# Altium PCB PCB1.PcbDoc
Units mil, origin at the board's own origin, x right, y up, seen from the top; angles counter-clockwise.
Board outline 6000 x 4000 mil, 2 copper layers (Top Layer, Bottom Layer); 89 components, 74 nets, 404 pads, 0 vias.
Unrouted connection lines stored in the file: 225.
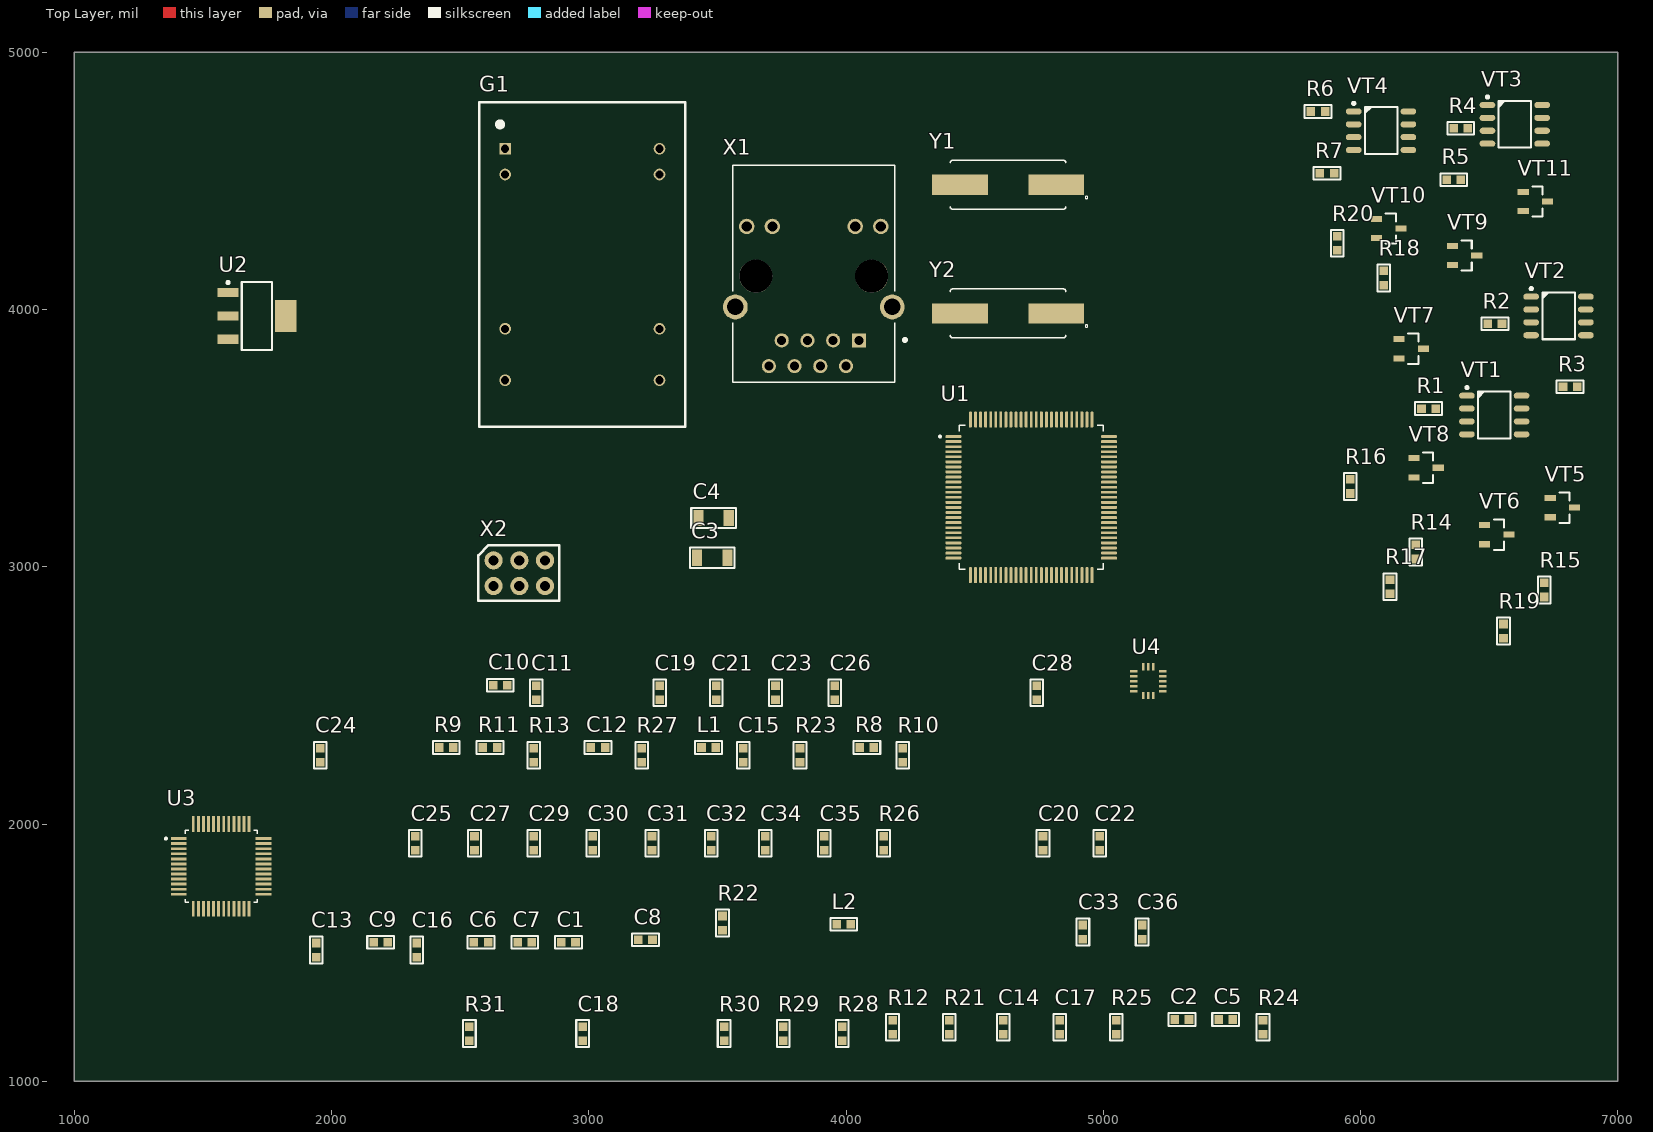
[diagram p0: Top Layer view]
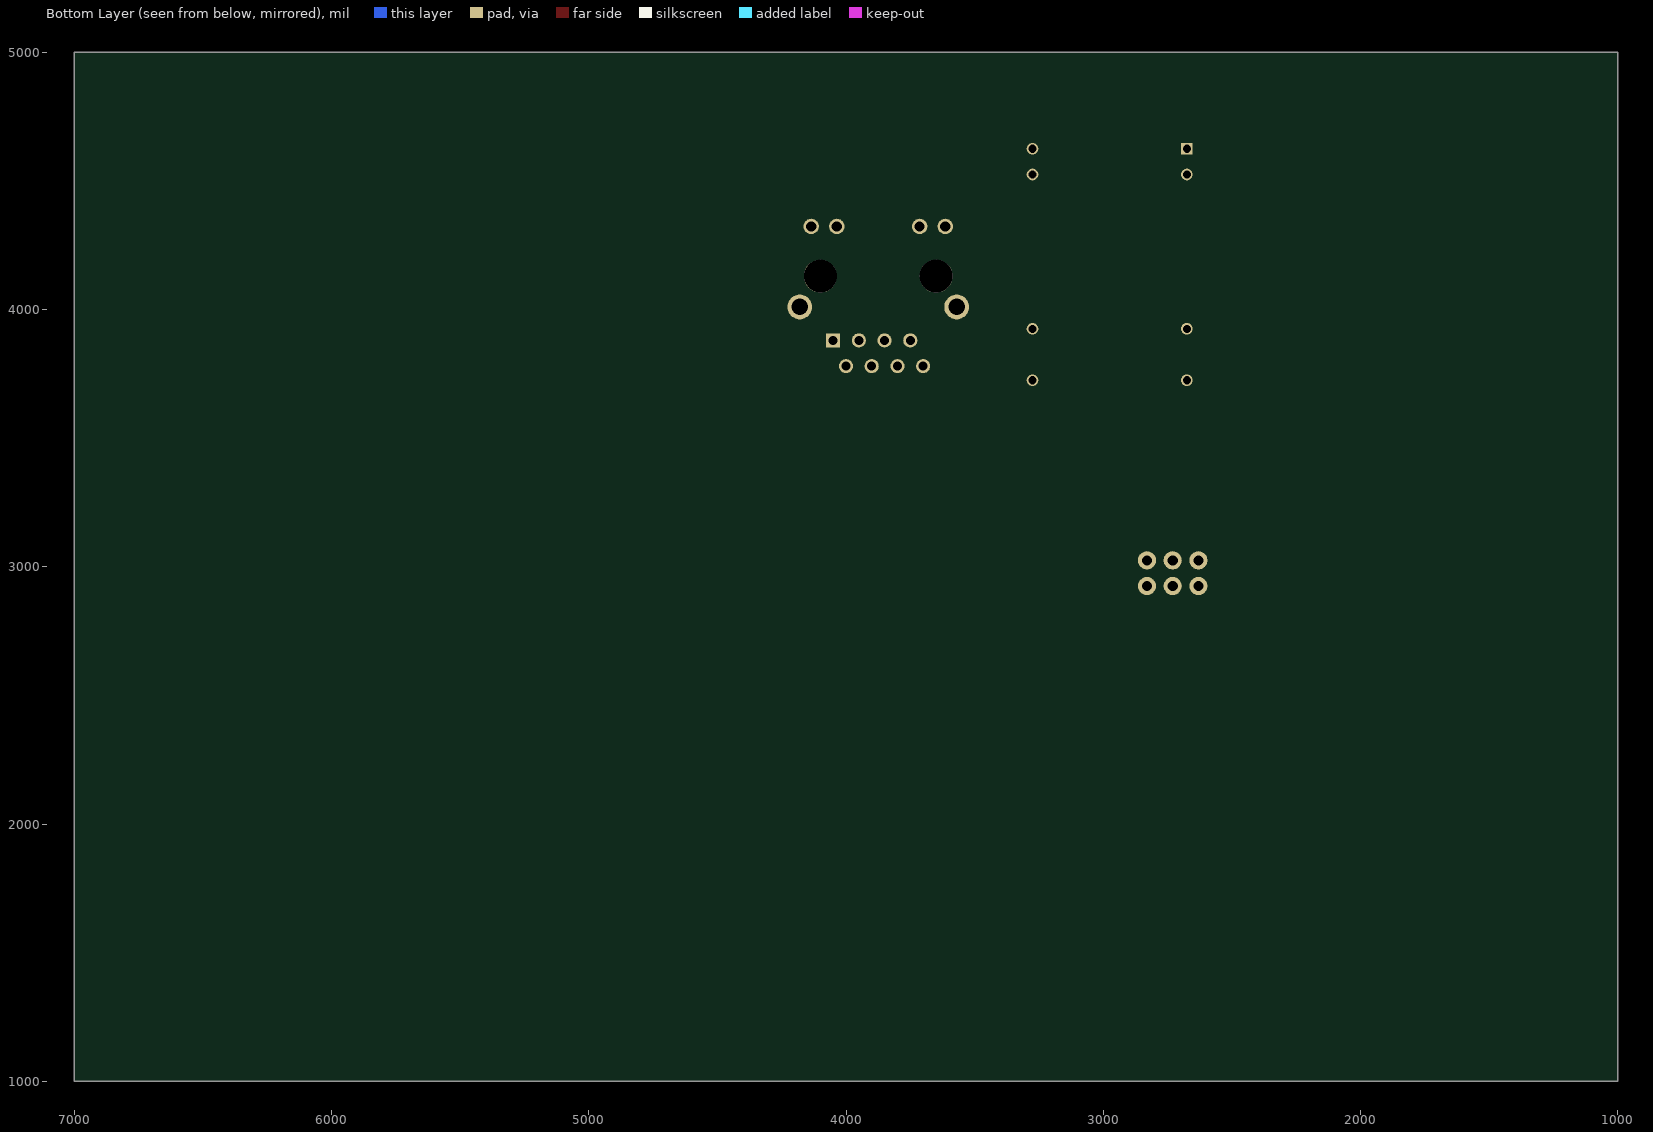
[diagram p1: Bottom Layer view, seen from below]

## Layer stack, top to bottom
Top Solder: solder mask 0.4, Solder Resist, Dk 3.5
Top Layer: signal copper 1.4
Dielectric 1: dielectric 12.6, FR-4, Dk 4.8
Bottom Layer: signal copper 1.4
Bottom Solder: solder mask 0.4, Solder Resist, Dk 3.5

## Board outline
1000,1000 7000,1000 7000,5000 1000,5000

## Design rules (kind name [scope] priority, off if disabled: settings)
Clearance [All] p1: gap=10 ignorepadtopadclearanceinfootprint=FALSE except(0: Arc-Hole Track-Hole SMDPad-Hole THPad-Hole Via-Hole Fill-Hole Poly-Hole Region-Hole Text-Hole)
PolygonConnect [All] p1: connectstyle=Relief reliefconductorwidth=10 reliefentries=4 polygonreliefangle="90 Angle" airgapwidth=10
RoomDefinition JAM [InComponentClass('JAM')] p1: confinementstyle=ConfineIn formatcopy=TRUE lockcomponents=FALSE outline 986,985 1285,985 1285,1375 986,1375
RoutingVias [All] p1: holewidth=28 width=50 viastyle="Through Hole" minholewidth=28 minwidth=50 maxholewidth=28 maxwidth=50
SolderMaskExpansion [All] p1: expansion=4 istentingtop=FALSE
Width [All] p1: maxlimit=10 minlimit=10 preferedwidth=10
30 further rules are at their usual default settings.

## Classes and differential pairs
net class Digtal: ACT CSC INT INT1 LINK MISO MOSI NRST RST SCK SCL SDA SWCLK SWDIO SWO
net class Power: +3,3V +5V +18V AGND AVDD GND GNDX
component class JAM: C1 C2 C3 C6 C8 C10 C12 C14 C16 C18 C20 C22 C24 C26 C28 C30 C32 C34 C36 G1 L1 L2 R1 R2 R3 R4 R5 R6 R7 R8 R9 R10 R11 R12 R13 R14 R15 R16 R17 R18 R19 R20 R21 R22 R23 R24 R25 R26 R27 R28 R29 R30 R31 U1 U2 U3 U4 VT1 VT2 VT3 VT4 VT5 VT6 VT7 VT8 VT9 VT10 VT11 X1 X2 Y1 Y2

## Components (designator, comment, footprint, x,y, rotation, side; value= is the part's Value field where it differs from the comment)
C1 "47uF" 0603 2921,1540 r0 top
C2 "0,1uF" 0603 5306,1240 r0 top
C3 "Ceramic capacitor, 1nF, X7R, ±10%, 2kV, 1206, -55...+125°C" "CAP: 1206" 3480,3035 r0 top value=1nF
C4 "Ceramic capacitor, 1nF, X7R, ±10%, 2kV, 1206, -55...+125°C" "CAP: 1206" 3485,3190 r0 top value=1nF
C5 "10uF" 0603 5476,1240 r0 top
C6 "47uF" 0603 2581,1540 r0 top
C7 "0,1uF" 0603 2751,1540 r0 top
C8 "18pF" 0603 3220,1550 r0 top
C9 "18pF" 0603 2191,1540 r0 top
C10 "20pF" 0603 2656,2540 r0 top
C11 "20pF" 0603 2796,2510 r90 top
C12 "10nF" 0603 3036,2297.44 r0 top
C13 "6,8nF" 0603 1941,1510 r90 top
C14 "6,8nF" 0603 4611,1210 r90 top
C15 "4,7uF" 0603 3601,2267.44 r90 top
C16 "0,1uF" 0603 2331,1510 r90 top
C17 "10nF" 0603 4831,1210 r90 top
C18 "0,1uF" 0603 2976,1185 r90 top
C19 "1uF" 0603 3276,2510 r90 top
C20 "1uF" 0603 4766,1925 r90 top
C21 "0,1uF" 0603 3496,2510 r90 top
C22 "0,1uF" 0603 4986,1925 r90 top
C23 "2,2uF" 0603 3726,2510 r90 top
C24 "0,1uF" 0603 1956,2267.44 r90 top
C25 "0,1uF" 0603 2326,1925 r90 top
C26 "2,2uF" 0603 3956,2510 r90 top
C27 "0,1uF" 0603 2556,1925 r90 top
C28 "0,1uF" 0603 4741,2510 r90 top
C29 "0,1uF" 0603 2786,1925 r90 top
C30 "0,1uF" 0603 3016,1925 r90 top
C31 "0,1uF" 0603 3246,1925 r90 top
C32 "0,1uF" 0603 3476,1925 r90 top
C33 "10uF" 0603 4921,1580 r90 top
C34 "0,1uF" 0603 3686,1925 r90 top
C35 "4,7uF" 0603 3916,1925 r90 top
C36 "0,1uF" 0603 5151,1580 r90 top
G1 "SCWN03B-05" DIP 2975,4175 r0 top
L1 "120uHz" 0603 3466,2297.44 r0 top
L2 "120uHz" 0603 3991,1610 r0 top
R1 "3k" 0603 6265,3615 r0 top
R2 "3k" 0603 6522.56,3945 r0 top
R3 "3k" 0603 6815,3700 r0 top
R4 "3k" 0603 6390,4705 r0 top
R5 "3k" 0603 6362.44,4505 r0 top
R6 "3k" 0603 5835,4770 r0 top
R7 "3k" 0603 5870,4530 r0 top
R8 "10k" 0603 4081,2297.44 r0 top
R9 "10k" 0603 2446,2297.44 r0 top
R10 "10k" 0603 4221,2267.44 r90 top
R11 "10k" 0603 2616,2297.44 r0 top
R12 "10k" 0603 4181,1210 r90 top
R13 "10k" 0603 2786,2267.44 r90 top
R14 "10k" 0603 6215,3057.56 r90 top
R15 "10k" 0603 6715,2910 r90 top
R16 "10k" 0603 5960,3312.44 r90 top
R17 "10k" 0603 6115,2922.44 r90 top
R18 "10k" 0603 6090,4122.56 r90 top
R19 "10k" 0603 6556,2750 r90 top
R20 "10k" 0603 5910,4257.56 r90 top
R21 "12,4k" 0603 4401,1210 r90 top
R22 "1M" 0603 3520,1615 r90 top
R23 "10k" 0603 3821,2267.44 r90 top
R24 "82" 0603 5621,1210 r90 top
R25 "82" 0603 5051,1210 r90 top
R26 "10k" 0603 4146,1925 r90 top
R27 "51" 0603 3206,2267.44 r90 top
R28 "?" 0603 3986,1185 r90 top
R29 "51" 0603 3756,1185 r90 top
R30 "1k" 0603 3526,1185 r90 top
R31 "1k" 0603 2536,1185 r90 top
U1 "STM32F407VGT6" QFP50P1600X1600X160-100N 4720,3270 r0 top
U2 "LD1117S33" SOT-223L 1710,3975 r0 top
U3 "W5500" QFP50P900X900X160-48N 1571,1835 r0 top
U4 "LIS331DL" LGA16R50P3X5_300X300X100 5175,2555 r0 top
VT1 "MOCD217R2M" SO-8 6520,3590 r0 top
VT2 "MOCD217R2M" SO-8 6770,3975 r0 top
VT3 "MOCD217R2M" SO-8 6600,4720 r0 top
VT4 "MOCD217R2M" SO-8 6080,4695 r0 top
VT5 "AOD407" SOT23 6785,3230 r0 top
VT6 "AOD407" SOT23 6530,3125 r0 top
VT7 "AOD407" SOT23 6197.24,3847.4 r0 top
VT8 "AOD407" SOT23 6255,3385 r0 top
VT9 "AOD407" SOT23 6405,4210 r0 top
VT10 "AOD407" SOT23 6110,4315 r0 top
VT11 "AOD407" SOT23 6680,4420 r0 top
X1 "HR911105A" HANRUN_HR911105A 3874.8,4130 r0 top
X2 "PROG" 3x2x2,54 2726.46,2971.85 r0 top
Y1 "25MHz" XTAL1170X500X450 4630,4485 r180 top
Y2 "8MHz" XTAL1170X500X450 4630,3985 r180 top

## Footprints (in the part's own frame and the unit in brackets; to place one, negate y for a bottom-side part, rotate by r counter-clockwise, add the part's x,y. Pads: shape width x height; smd on the part's side, far side on the other; paste and mask are expansions set on the pad)
3x2x2,54 [mm]
  round 1.8 hole 1: 1(-2.45,1.35) 2(0.09,1.35) 3(2.63,1.35) 4(-2.45,-1.19) 5(0.09,-1.19) 6(2.63,-1.19)
  silkscreen extent -3.95,-2.65 4.05,2.85
0603 [mm]
  rect 0.85x0.85 smd: 1(-0.7,0) 2(0.7,0)
  silkscreen extent -1.33,-0.63 1.33,0.63, body extent -0.8,-0.4 0.8,0.4, height 0.3
"CAP: 1206" [mm]
  rect 1x1.6 smd: 1(-1.5,0) 2(1.5,0)
  silkscreen extent -2.2,-1 2.2,1, body extent -1.6,-0.8 1.6,0.8, height 1
DIP [mm]
  rect 1.15x1.15 hole 0.8: 2(-7.62,11.43)
  round 1.15 hole 0.8: 3(-7.62,8.89) 9(-7.62,-6.35) 11(-7.62,-11.43) 14(7.62,-11.43) 16(7.62,-6.35) 22(7.62,8.89) 23(7.62,11.43)
  silkscreen extent -10.16,-16 10.16,16
HANRUN_HR911105A [mm]
  rect 1.398x1.398 hole 0.89: 1(4.45,-6.35)
  round 1.398 hole 0.89: 2(3.18,-8.89) 3(1.91,-6.35) 4(0.64,-8.89) 5(-0.63,-6.35) 6(-1.9,-8.89) 7(-3.17,-6.35) 8(-4.44,-8.89)
  round 1.53 hole 1.02: 9(6.625,4.9) 10(4.085,4.9) 11(-4.085,4.9) 12(-6.625,4.9)
  round 2.445 hole 1.63: 15(7.745,-3.05) 16(-7.745,-3.05)
  round 3.25 hole 3.25 unplated: ""(-5.715,0) ""(5.715,0)
  silkscreen extent -8,-10.48 9.15,10.92
LGA16R50P3X5_300X300X100 [mil]
  rect 28x10 smd: 1(-56,39) 2(-56,20) 3(-56,0) 4(-56,-20) 5(-56,-39) 9(56,-39) 10(56,-20) 11(56,0) 12(56,20) 13(56,39)
  rect 10x28 smd: 6(-20,-56) 7(0,-56) 8(20,-56) 14(20,56) 15(0,56) 16(-20,56)
QFP50P900X900X160-48N [mm]
  rect 1.56x0.28 smd: 1(-4.18,2.75) 2(-4.18,2.25) 3(-4.18,1.75) 4(-4.18,1.25) 5(-4.18,0.75) 6(-4.18,0.25) 7(-4.18,-0.25) 8(-4.18,-0.75) 9(-4.18,-1.25) 10(-4.18,-1.75) 11(-4.18,-2.25) 12(-4.18,-2.75) 25(4.18,-2.75) 26(4.18,-2.25) 27(4.18,-1.75) 28(4.18,-1.25) 29(4.18,-0.75) 30(4.18,-0.25) 31(4.18,0.25) 32(4.18,0.75) 33(4.18,1.25) 34(4.18,1.75) 35(4.18,2.25) 36(4.18,2.75)
  rect 0.28x1.56 smd: 13(-2.75,-4.18) 14(-2.25,-4.18) 15(-1.75,-4.18) 16(-1.25,-4.18) 17(-0.75,-4.18) 18(-0.25,-4.18) 19(0.25,-4.18) 20(0.75,-4.18) 21(1.25,-4.18) 22(1.75,-4.18) 23(2.25,-4.18) 24(2.75,-4.18) 37(2.75,4.18) 38(2.25,4.18) 39(1.75,4.18) 40(1.25,4.18) 41(0.75,4.18) 42(0.25,4.18) 43(-0.25,4.18) 44(-0.75,4.18) 45(-1.25,4.18) 46(-1.75,4.18) 47(-2.25,4.18) 48(-2.75,4.18)
  silkscreen extent -5.55,-3.55 3.55,3.55
QFP50P1600X1600X160-100N [mm]
  rrect50% 1.56x0.28 smd: 1(-7.68,6) 2(-7.68,5.5) 3(-7.68,5) 4(-7.68,4.5) 5(-7.68,4) 6(-7.68,3.5) 7(-7.68,3) 8(-7.68,2.5) 9(-7.68,2) 10(-7.68,1.5) 11(-7.68,1) 12(-7.68,0.5) 13(-7.68,0) 14(-7.68,-0.5) 15(-7.68,-1) 16(-7.68,-1.5) 17(-7.68,-2) 18(-7.68,-2.5) 19(-7.68,-3) 20(-7.68,-3.5) 21(-7.68,-4) 22(-7.68,-4.5) 23(-7.68,-5) 24(-7.68,-5.5) 25(-7.68,-6) 51(7.68,-6) 52(7.68,-5.5) 53(7.68,-5) 54(7.68,-4.5) 55(7.68,-4) 56(7.68,-3.5) 57(7.68,-3) 58(7.68,-2.5) 59(7.68,-2) 60(7.68,-1.5) 61(7.68,-1) 62(7.68,-0.5) 63(7.68,0) 64(7.68,0.5) 65(7.68,1) 66(7.68,1.5) 67(7.68,2) 68(7.68,2.5) 69(7.68,3) 70(7.68,3.5) 71(7.68,4) 72(7.68,4.5) 73(7.68,5) 74(7.68,5.5) 75(7.68,6)
  rrect50% 0.28x1.56 smd: 26(-6,-7.68) 27(-5.5,-7.68) 28(-5,-7.68) 29(-4.5,-7.68) 30(-4,-7.68) 31(-3.5,-7.68) 32(-3,-7.68) 33(-2.5,-7.68) 34(-2,-7.68) 35(-1.5,-7.68) 36(-1,-7.68) 37(-0.5,-7.68) 38(0,-7.68) 39(0.5,-7.68) 40(1,-7.68) 41(1.5,-7.68) 42(2,-7.68) 43(2.5,-7.68) 44(3,-7.68) 45(3.5,-7.68) 46(4,-7.68) 47(4.5,-7.68) 48(5,-7.68) 49(5.5,-7.68) 50(6,-7.68) 76(6,7.68) 77(5.5,7.68) 78(5,7.68) 79(4.5,7.68) 80(4,7.68) 81(3.5,7.68) 82(3,7.68) 83(2.5,7.68) 84(2,7.68) 85(1.5,7.68) 86(1,7.68) 87(0.5,7.68) 88(0,7.68) 89(-0.5,7.68) 90(-1,7.68) 91(-1.5,7.68) 92(-2,7.68) 93(-2.5,7.68) 94(-3,7.68) 95(-3.5,7.68) 96(-4,7.68) 97(-4.5,7.68) 98(-5,7.68) 99(-5.5,7.68) 100(-6,7.68)
  silkscreen extent -9.1,-7.1 7.1,7.1
SO-8 [mm]
  rrect100% 1.55x0.6 smd: 1(-2.7,1.905) 2(-2.7,0.635) 3(-2.7,-0.635) 4(-2.7,-1.905) 5(2.7,-1.905) 6(2.7,-0.635) 7(2.7,0.635) 8(2.7,1.905)
  round 0.7 on Mech1: 28(-2.395,1.8)
  silkscreen extent -2.82,-2.3 1.61,2.82, body extent -3,-2.45 3,2.45, height 1.75
SOT23 [mm]
  rect 1.1x0.6 smd: 1(-1.2,0.95) 2(-1.2,-0.95) 3(1.2,0)
  round 0.5 on Mech1: ""(-0.9,1.1)
  silkscreen extent -0.3,-1.5 0.7,1.5, body extent -1.32,-1.52 1.32,1.52, height 1.12
SOT-223L [mm]
  rect 2.1x0.9 smd: 1(-2.85,2.3) 2(-2.85,0) 3(-2.85,-2.3)
  rect 2.1x3.2 smd: 4(2.85,0)
  silkscreen extent -2.97,-3.35 1.5,3.42, body extent -1.85,-3.35 1.85,3.35, height 1.8
XTAL1170X500X450 [mm]
  rect 5.5x2 smd: 1(-4.75,0) 2(4.75,0)
  silkscreen extent -7.88,-2.41 5.71,2.41

## Part data
C1 C2 C5 C6 C7 C8 C9 C10 C11 C12 C13 C14 C15 C16 C17 C18 C19 C20 C21 C22 C23 C24 C25 C26 C27 C28 C29 C30 C31 C32 C33 C34 C35 C36: library part Cap
C3 C4: library part Ceramic_1206, Manufacturer=Yageo, Package=1206, PartNumber=CC1206KRX7R9BB104, Temperature=-55...+125°C, Tolerance=±10%, TypeCapacitor="Ceramic capacitor", TypeDielectric=X7R, Voltage=2kV, HelpURL=https://www.digikey.com/product-detail/en/yageo/CC1206KRX7R9BB104/311-1179-1-ND/303089, ValueManufacturerPartNumber="Ceramic capacitor, 1nF, X7R, ±10%, 2kV, 1206, -55...+125°C"
G1: "DC-DC Regulated Converter DIP"
L1 L2: library part Ind
R1 R2 R3 R4 R5 R6 R7 R8 R9 R10 R11 R12 R13 R14 R15 R16 R17 R18 R19 R20 R21 R22 R23 R24 R25 R26 R27 R28 R29 R30 R31: library part Rez
U1: "ARMÂ® CortexÂ®-M4 STM32F4 Microcontroller IC 32-Bit 168MHz 1MB _1M x 8_ FLASH 100-LQFP _14x14_", Package="LQFP-100 STMicroelectronics", Availability=Unavailable, MF=STMicroelectronics, MP=STM32F407VGT6, Price=None, SnapEDA_Link=https://www.snapeda.com/parts/STM32F407VGT6/STMicroelectronics/view-part/106801/?ref=snap
U2: "Adjustable and fixed low drop positive voltage regulator, SOT-223"
U3: "Socket Contact Silver 17-20 AWG Crimp Power", Package="LQFP-48 WIZnet", Availability=Unavailable, MF=WIZnet, MP=W5500, Price=None, SnapEDA_Link=https://www.snapeda.com/parts/W5500/WIZnet/view-part/45250/?ref=snap
U4: "ÐÐºÑÐµÐ»ÐµÑ€Ð¾Ð¼ÐµÑ‚Ñ€ Ð¿Ð¾ Ð¾ÑÑÐ¼ X, Y, Z Â± 2g, 4g, 8g 25 Ð“Ñ† ~ 500 Ð“Ñ† 16-LGA (3x3)", Package="LGA-16 STMicroelectronics", Availability=Bad, MF=STMicroelectronics, MP=LIS331DL, Price=None, SnapEDA_Link=https://www.snapeda.com/parts/LIS331DL/STMicroelectronics/view-part/494085/?ref=snap
VT1 VT2 VT3 VT4: library part Opto
VT5 VT6 VT7 VT8 VT9 VT10 VT11: library part MOSFET_P_123, CurrentDS=2.6A, InputCapacitor=220pF, Manufacturer="Infineon Technologies", MaxPower=2.5W, Package=SOT-23, PartNumber=IRLML2246TRPBF, Temperature=-55...+150°C, ValueManufacturerPartNumber="MOSFET P-channel transistor, 20V, 2.6A, 2.9nC, 2.5W, 135mOhm, 220pF, SOT-23, -55...+150°C", VoltageDS=20V, GateCharge=2.9nC, HelpURL=https://www.digikey.com/product-detail/en/infineon-technologies/IRLML2246TRPBF/IRLML2246TRPBFCT-ND/2639576, RDS=135mOhm, TypeTransistor="MOSFET P-channel transistor"
X1: "HR911105A Ethernet Interface Arduino Platform Evaluation Expansion Board", Package=None, Availability=Unavailable, MF=DFRobot, MP=HR911105A, Price=None, SnapEDA_Link=https://www.snapeda.com/parts/HR911105A/DFRobot/view-part/214807/?ref=snap
Y1 Y2: library part FOXSDLF/245F-20, "24.576MHz Â±30ppm Crystal 20pF 30 Ohms HC-49/US", Package="HC49SD Fox Electronics", Availability=Warning, MF="Fox Electronics", Mouser-Purchase-URL=https://snapeda.com/shop?store=Mouser&id=105256, MP=FOXSDLF/245F-20, Price=None, SnapEDA_Link=https://www.snapeda.com/parts/FOXSDLF/245F-20/Fox%20Electronics/view-part/105256/?ref=snap

## Nets (pads, with @x,y where several pads share a name; then routed paths per layer and width w, separated by ;. In a path a pad name is that pad's centre, name@x,y a point inside that pad or via, vN(x,y) a via of type N, cw(c..) or ccw(c..) an arc to the next point about the centre after c; other vN are vias at no path point)
+3,3V: C5.2 C15.2 C25.2 C27.2 C29.2 C30.2 C31.2 C32.2 C33.2 C34.2 C35.2 C36.2 L1.1 L2.1 R8.2 R10.2 R12.2 R30.1 R31.1 U1.6 U2.2 U3.20 U3.28 U4.1 U4.7 U4.8 U4.14 U4.15 X2.1
+5V: C2.2 C6.2 C7.2 G1.14 U2.3
+18V: C1.2 G1.22 G1.23 R14.2 R15.2 R16.2 R17.2 R18.2 R19.2 R20.2 VT5.3 VT6.3 VT7.3 VT8.3 VT9.3 VT10.3 VT11.3
ACT: U3.27 X1.10
AGND: C1.1 C3.1 G1.2 G1.3 U3.3 U3.9 U3.14 U3.16 U3.19 U3.48 VT1.5 VT1.7 VT2.5 VT2.7 VT3.5 VT3.7 VT4.5 VT4.7
AVDD: C16.2 C18.1 C19.2 C20.2 C21.2 C22.2 L1.2 L2.2 R27.1 R28.1 R29.1 U1.21 U1.22 U3.4 U3.8 U3.11 U3.15 U3.17 U3.21
CSC: U1.51 U3.32
GND: C2.1 C3.2 C4.2 C5.1 C6.1 C7.1 C8.1 C9.1 C10.1 C11.1 C12.1 C15.1 C16.1 C17.2 C18.2 C19.1 C20.1 C21.1 C22.1 C23.1 C24.2 C25.1 C26.1 C27.1 C28.1 C29.1 C30.1 C31.1 C32.1 C33.1 C34.1 C35.1 C36.1 G1.16 R9.1 R11.1 R13.1 R21.1 R23.1 R26.2 U1.10 U1.20 U1.27 U1.74 U1.99 U2.1 U3.29 U4.5 U4.10 U4.12 U4.13 U4.16 VT1.2 VT1.4 VT2.2 VT2.4 VT3.2 VT3.4 VT4.2 VT4.4 X2.6
GNDX: C4.1 X1.8 X1.15 X1.16
INT: U1.45 U3.36
INT1: U4.11
INT2: U4.9
LINK: U3.25 X1.11
MISO: U1.53 U3.34
MOSI: U1.54 U3.35
NetC8_2: C8.2 R22.1 U3.31 Y1.1
NetC9_2: C9.2 R22.2 U3.30 Y1.2
NetC10_2: C10.2 U1.12 Y2.1
NetC11_2: C11.2 U1.13 Y2.2
NetC12_2: C12.2 U3.22
NetC13_1: C13.1 X1.6
NetC13_2: C13.2 R24.1 U3.5
NetC14_1: C14.1 X1.3
NetC14_2: C14.2 R25.1 U3.6
NetC17_1: C17.1 R24.2 R25.2 X1.5
NetC23_2: C23.2 U1.73
NetC24_1: C24.1 R28.2 X1.4
NetC26_2: C26.2 U1.49
NetR1_1: R1.1 U1.96
NetR1_2: R1.2 VT1.3
NetR2_1: R2.1 U1.95
NetR2_2: R2.2 VT2.1
NetR3_1: R3.1 U1.93
NetR3_2: R3.2 VT2.3
NetR4_1: R4.1 U1.92
NetR4_2: R4.2 VT3.1
NetR5_1: R5.1 U1.91
NetR5_2: R5.2 VT3.3
NetR6_1: R6.1 U1.36
NetR6_2: R6.2 VT4.1
NetR7_1: R7.1 U1.35
NetR7_2: R7.2 VT4.3
NetR8_1: R8.1 R9.2 U3.45
NetR10_1: R10.1 R11.2 U3.44
NetR12_1: R12.1 R13.2 U3.43
NetR14_1: R14.1 VT1.6 VT5.1
NetR15_1: R15.1 VT2.8 VT6.1
NetR16_1: R16.1 VT2.6 VT7.1
NetR17_1: R17.1 VT3.8 VT8.1
NetR18_1: R18.1 VT3.6 VT9.1
NetR19_1: R19.1 VT4.8 VT10.1
NetR20_1: R20.1 VT4.6 VT11.1
NetR21_2: R21.2 U3.10
NetR23_2: R23.2 U3.23
NetR26_1: R26.1 U1.94
NetR27_2: R27.2 X1.2
NetR29_2: R29.2 X1.1
NetR30_2: R30.2 X1.9
NetR31_2: R31.2 X1.12
NRST: C28.2 U1.14
RST: U1.44 U3.37
SCK: U1.52 U3.33
SCL: U1.47 U4.4
SDA: U1.48 U4.6
SWCLK: U1.76 X2.2
SWDIO: U1.72 X2.3
SWO: U1.89 X2.5
Tuda1: VT5.2
Tuda2: VT6.2
Tuda3: VT7.2
Tuda4: VT8.2
Tuda5: VT9.2
Tuda6: VT10.2
Tuda7: VT11.2
pads on no net: G1.9 G1.11 U1.1 U1.2 U1.3 U1.4 U1.5 U1.7 U1.8 U1.9 U1.11 U1.15 U1.16 U1.17 U1.18 U1.19 U1.23 U1.24 U1.25 U1.26 U1.28 U1.29 U1.30 U1.31 U1.32 U1.33 U1.34 U1.37 U1.38 U1.39 U1.40 U1.41 U1.42 U1.43 U1.46 U1.50 U1.55 U1.56 U1.57 U1.58 U1.59 U1.60 U1.61 U1.62 U1.63 U1.64 U1.65 U1.66 U1.67 U1.68 U1.69 U1.70 U1.71 U1.75 U1.77 U1.78 U1.79 U1.80 U1.81 U1.82 U1.83 U1.84 U1.85 U1.86 U1.87 U1.88 U1.90 U1.97 U1.98 U1.100 U2.4 U3.1 U3.2 U3.7 U3.12 U3.13 U3.18 U3.24 U3.26 U3.38 U3.39 U3.40 U3.41 U3.42 U3.46 U3.47 U4.2 U4.3 VT1.1 VT1.8 VT1.28 VT2.28 VT3.28 VT4.28 VT5. VT6. VT7. VT8. VT9. VT10. VT11. X1. X1.7 X2.4